# Altium PCB 127PM FROM SCRATCH.PcbDoc
Units mil, origin at the board's own origin, x right, y up, seen from the top; angles counter-clockwise.
Board outline 2460 x 1595 mil, 2 copper layers (Top Layer, Bottom Layer); 5 components, 10 nets, 38 pads, 4 vias.
Unrouted connection lines stored in the file: 3.
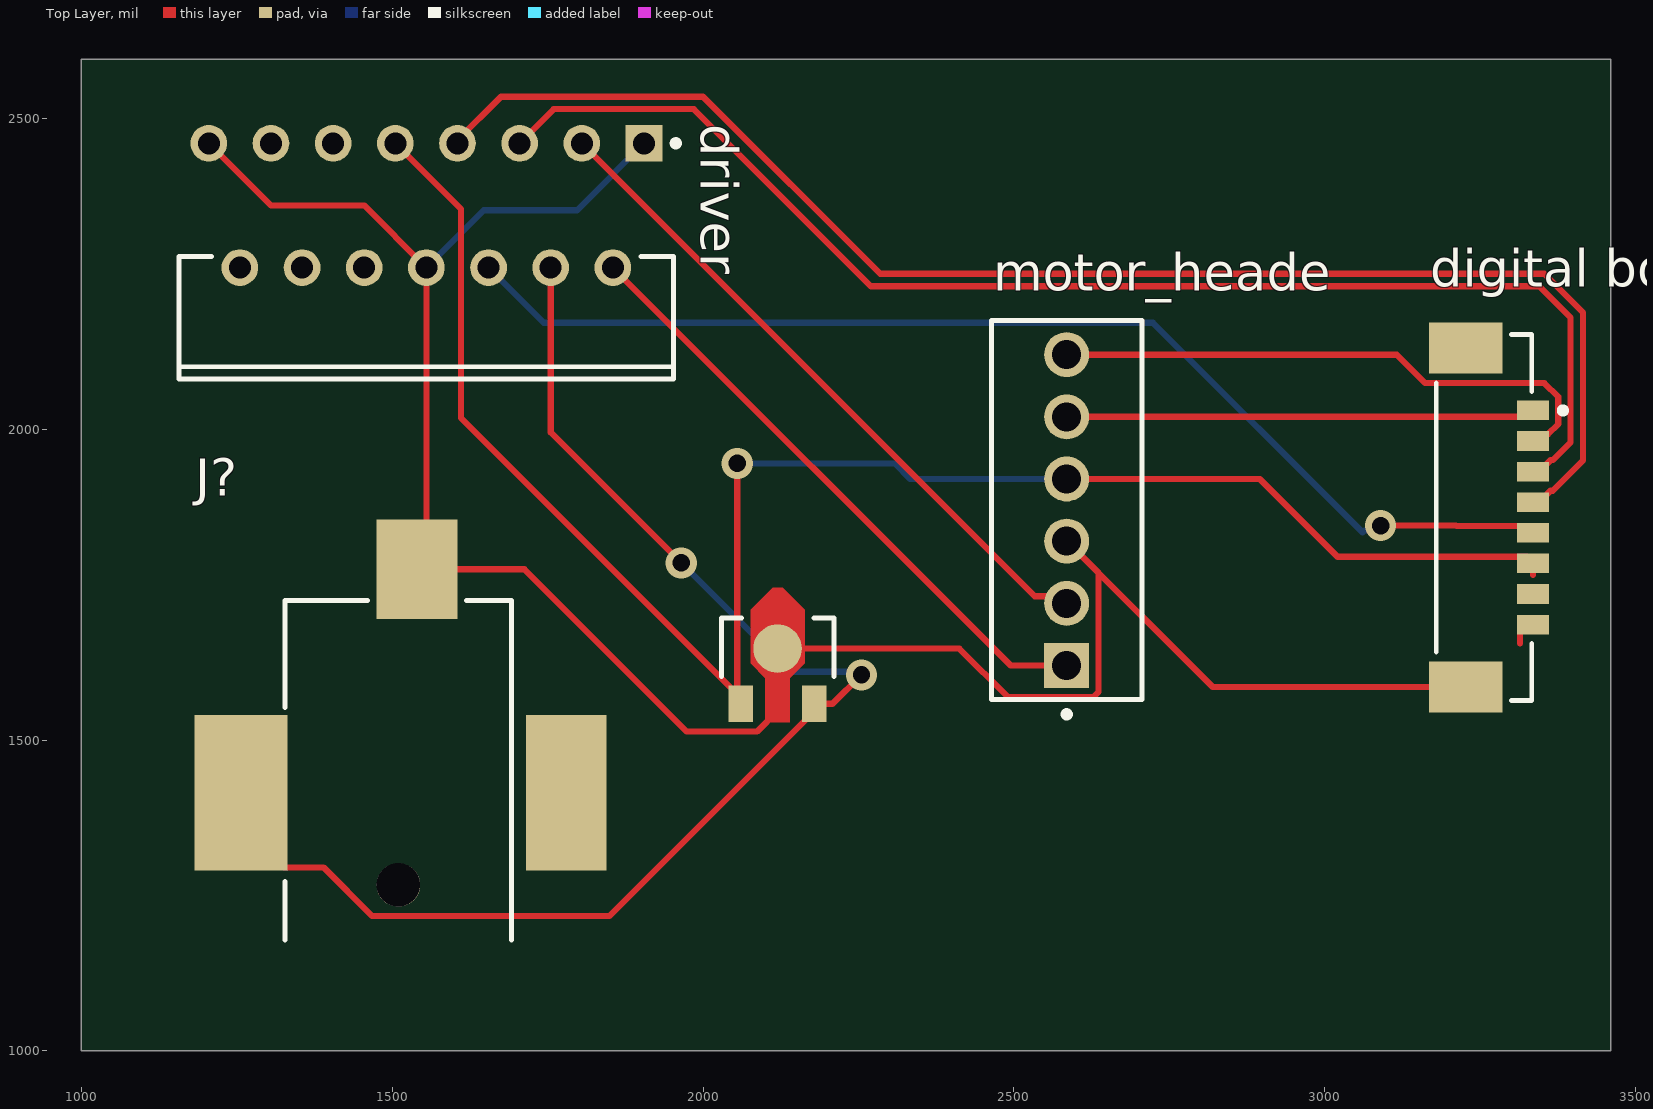
[diagram p0: Top Layer view]
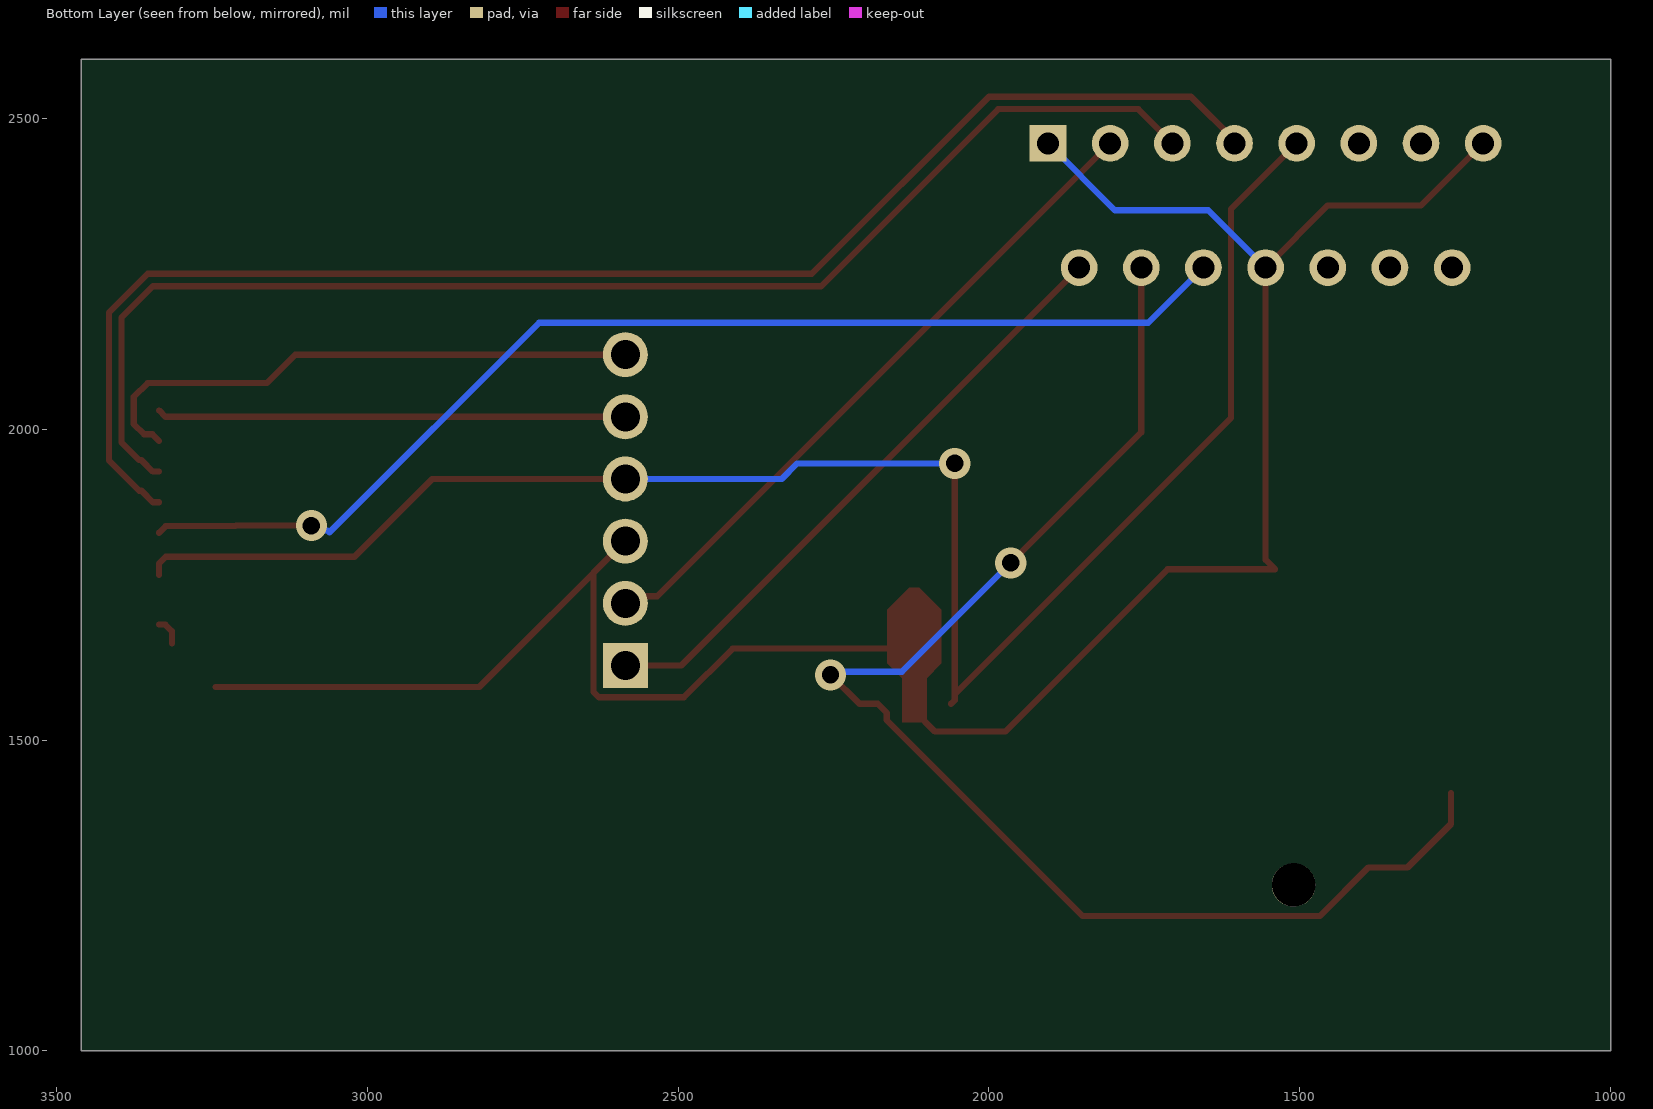
[diagram p1: Bottom Layer view, seen from below]
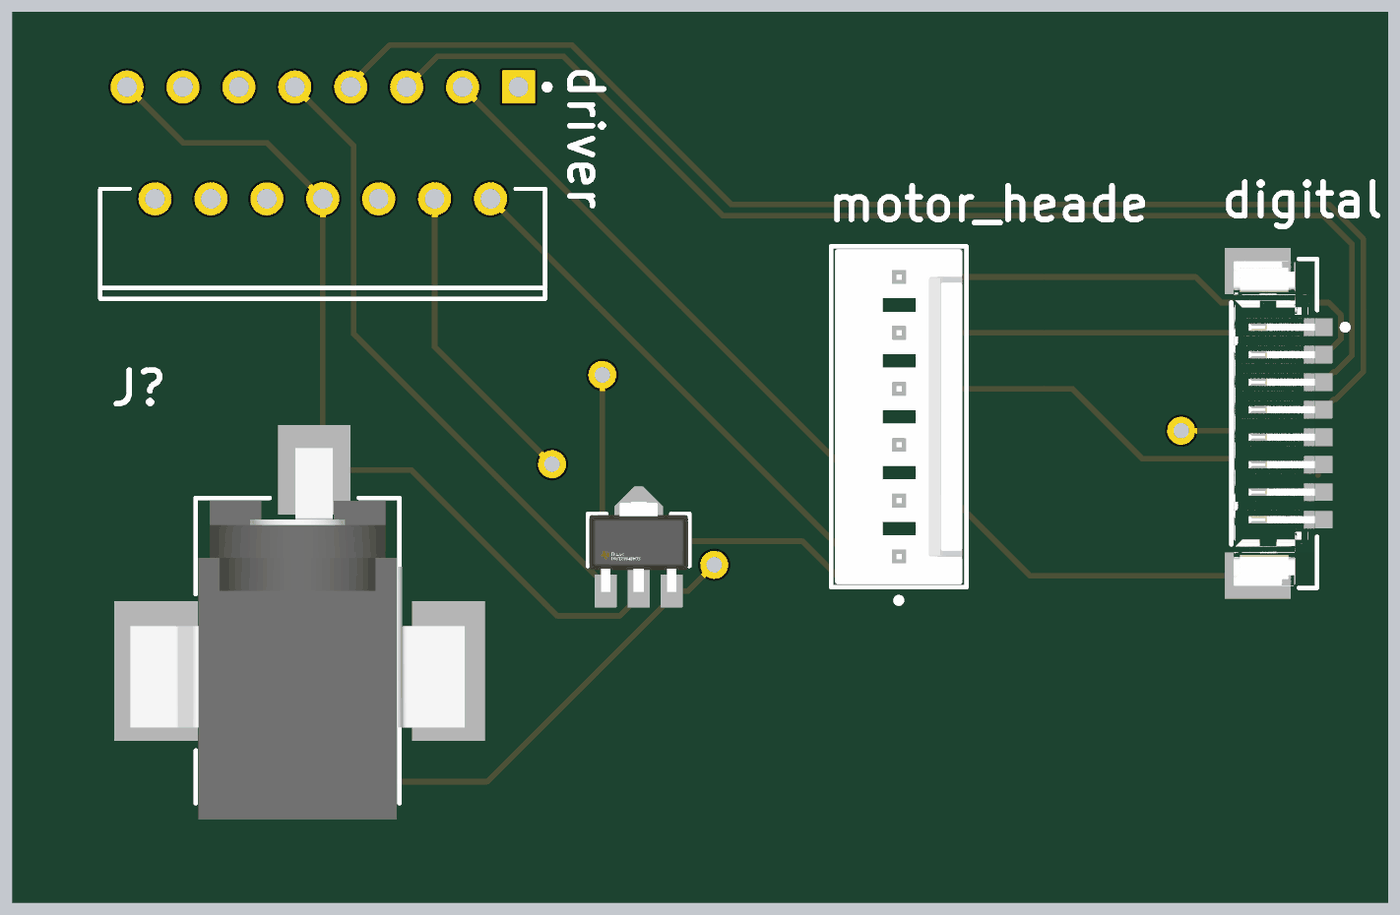
[diagram p2: 3D render of the assembled board from above, using the file's embedded part models]

## Layer stack, top to bottom
Top Solder: solder mask 0.4, Solder Resist, Dk 3.5
Top Layer: signal copper 1.4
Dielectric 1: dielectric 12.6, FR-4, Dk 4.8
Bottom Layer: signal copper 1.4
Bottom Solder: solder mask 0.4, Solder Resist, Dk 3.5

## Board outline
1000,1000 3460,1000 3460,2595 1000,2595

## Design rules (kind name [scope] priority, off if disabled: settings)
Clearance [All] p1: gap=10 ignorepadtopadclearanceinfootprint=FALSE except(0: Arc-Hole Track-Hole SMDPad-Hole THPad-Hole Via-Hole Fill-Hole Poly-Hole Region-Hole Text-Hole)
PolygonConnect [All] p1: connectstyle=Relief reliefconductorwidth=10 reliefentries=4 polygonreliefangle="90 Angle" airgapwidth=10
RoutingVias [All] p1: holewidth=28 width=50 viastyle="Through Hole" minholewidth=28 minwidth=50 maxholewidth=28 maxwidth=50
SolderMaskExpansion [All] p1: expansion=4 istentingtop=FALSE
Width [All] p1: maxlimit=10 minlimit=10 preferedwidth=10
30 further rules are at their usual default settings.

## Components (designator, comment, footprint, x,y, rotation, side; value= is the part's Value field where it differs from the comment)
"digital board I/O header" "53398-0871" FP-53398-0871-MFG 3256.26,1858.03 r90 top
driver "L298N" STM-FM-15 1555,2360 r270 top
J? "RASM722PTR13X" FP-RASM722PTR13X-MFG 1509.92,1434.29 r0 top
motor_heade "22-27-2061" FP-22-27-2061-MFG 2585,1870 r90 top
? "UA78L05CPK" FP-PK0003A-MFG 2120,1645 r0 top

## Footprints (in the part's own frame and the unit in brackets; to place one, negate y for a bottom-side part, rotate by r counter-clockwise, add the part's x,y. Pads: shape width x height; smd on the part's side, far side on the other; paste and mask are expansions set on the pad)
FP-22-27-2061-MFG [mm]
  rect 1.84x1.84 hole 1.19 paste-1000 mask+0: 1(-6.35,0)
  round 1.84 hole 1.19 paste-1000 mask+0: 2(-3.81,0) 3(-1.27,0) 4(1.27,0) 5(3.81,0) 6(6.35,0)
  silkscreen extent -8.47,-3.08 7.75,3.08, body extent -7.85,-3.18 7.85,3.17, height 0.25
FP-53398-0871-MFG [mm]
  rect 0.8x1.3 smd paste+0 mask+0: 1(4.375,-2) 2(3.125,-2) 3(1.875,-2) 4(0.625,-2) 5(-0.625,-2) 6(-1.875,-2) 7(-3.125,-2) 8(-4.375,-2)
  rect 2.1x3 smd paste+0 mask+0: 9(-6.925,0.75) 10(6.925,0.75)
  silkscreen extent -7.47,-3.35 7.47,1.95, body extent -8.08,-2.75 8.08,2.35, height 0.25
FP-PK0003A-MFG [mm]
  rect 1x1.5 smd paste+0 mask+0: 1(-1.5,-2.203) 3(1.5,-2.203)
  round 1.98 smd paste+0 mask+0: 2(0,0.058)
  Top Layer region: 0,-2.953 -0.5,-2.953 -0.5,-1.152 -1.1,-0.553 -1.1,1.647 -0.2,2.548 0.2,2.548 1.1,1.647 1.1,-0.553 0.5,-1.152 0.5,-2.953
  silkscreen extent -2.3,-1.08 2.3,1.3, body extent -2.55,-3.05 2.55,2.65, height 0.25
FP-RASM722PTR13X-MFG [mm]
  rect 3.3x4.06 smd paste+0 mask+0: 1(0.76,8.65)
  rect 3.81x6.35 smd paste+0 mask+0: 2(-6.43,-0.49)
  rect 3.3x6.35 smd paste+0 mask+0: 3(6.86,-0.49)
  round 1.78 hole 1.78 unplated paste-1000 mask+0: ""(0,-4.25)
  silkscreen extent -4.63,-6.5 4.63,7.38, body extent -8.43,-7.48 8.61,10.78, height 0.25
STM-FM-15 [mm] "FM, 15-Leads, Body 20.2x5mm, Pitch 1.27mm"
  rect 1.5x1.5 hole 0.9: 1(-2.54,8.89)
  round 1.5 hole 0.9: 2(2.54,7.62) 3(-2.54,6.35) 4(2.54,5.08) 5(-2.54,3.81) 6(2.54,2.54) 7(-2.54,1.27) 8(2.54,0) 9(-2.54,-1.27) 10(2.54,-2.54) 11(-2.54,-3.81) 12(2.54,-5.08) 13(-2.54,-6.35) 14(2.54,-7.62) 15(-2.54,-8.89)
  silkscreen extent -2.66,-10.1 7.09,10.32, body extent -2.8,-10.1 7.09,10.1, height 21

## Part data
"digital board I/O header": library part CMP-04776-000009-1, "CONN HEADER SMD 8POS 1.25MM", Ambient Temperature Range High=+105°C, Ambient Temperature Range Low=-40°C, Current Rating=1A, Manufacturer=Molex, Package=0, Temperature="-40°C to +105°C", Voltage Rating=125V, Automotive=No, Category=Conn, ComponentLink2Description=Datasheet, ComponentLink2URL=https://www.molex.com/pdm_docs/ps/PS-51021-024-001.pdf, Conn Gender=Male, Conn Orientation=Vertical, Contact Material=Tin,Nickel, Device Class L1=Connectors, Device Class L2="Headers and Wire Housings", Device Class L3=unset, Digikey Description="CONN HEADER SMD 8POS 1.25MM", Footprint Url=https://www.molex.com/pdm_docs/sd/533980871_sd.pdf, Height=4.9mm, Lead Free=Yes, Manufacturer Part Number=53398-0871, Mouser Description="Headers & Wire Housings VERTICAL HDR SMT 8P", Number Of Contacts=8, Number Of Rows=1, Octopart=https://octopart.com/53398-0871-molex-655298, Pitch=1.25mm, RoHS=TRUE, Standoff Height=0.05mm, Temperature Range High=+105°C, Temperature Range Low=-40°C
driver: library part CMP-2000-06526-1, "Dual Full-Bridge Driver, 4.8 to 46 V, -40 to 150 degC, 15-Pin FM (MW 15L), RoHS, Tube", Driver Case Style=Multiwatt, Manufacturer=STMicroelectronics, Operating Temperature Max=130°C, Operating Temperature Min=-25°C, Output Current=2A, Output Voltage=46V, Package Description="15-Pin Flange Mount, Body 5 x 19.6 mm, Pitch 1.27 mm", Package Reference=FM-15, PartNumber=L298, Supply Voltage Max=7V, Supply Voltage Min=4.5V, Automotive Qualification Standard=-, Datasheet URL=https://datasheet.ciiva.com/15109/getdatasheetpartid-50682-15109332.pdf, Datasheet Version=01/2000, Manufacturer URL=http://www.st.com/, Motor Type=FullBridge, Mounting Technology=ThroughHole, MSL=-, No. of Outputs=4Outputs, No. of Pins=15Pins, Packaging=Each, Product Range=-, SVHC=NoSVHC(17-Dec-2015)
J?: library part CMP-47995-000002-1, "CONN PWR JACK 2.1X5.5MM SOLDER", Case/Package=SMD/SMT, Color=Black, Current Rating=5A, Package Quantity=120, Connector Type=Jack, Contact Material="Copper Alloy", Contact Plating=Tin, Gender=Male, Housing Color=Black, Housing Material=Thermoplastic, Mount="Surface Mount", Shielding=Unshielded, Termination=Solder
motor_heade: library part CMP-04776-000309-1, "CONN HEADER VERT 6POS 2.54MM", Color=Natural, Contact Resistance=10mR, Current Rating=4A, Flammability Rating="UL94 V-0", Housing Color=White, Max Operating Temperature=75°C, Max Voltage Rating (AC)=250V, Min Operating Temperature=0°C, Package Quantity=10000, Connector Type="Male Pin", Contact Material=Brass, Contact Mating Length=0.295inch, Contact Plating=Tin, Contact Type="Male Pin", Depth=5.8mm, Fastening Type=Friction, Gender=Male, Hole Diameter=1.02mm, Housing Material=Nylon, Lead Pitch=2.54mm, Length=15.24mm, Material=Nylon, Max Current Rating=4A, Mount="Through Hole", Number Of Contacts=6, Number of Positions=6, Number Of Rows=1, Orientation=Straight, Packaging=Bulk, Pitch=2.54mm, Radiation Hardening=No, REACH SVHC="No SVHC", Series=KK, Termination=Solder, Voltage Rating=250V, Voltage Rating (AC)=250V, Working Voltage=250V
?: library part CMP-2000-07341-2, "IC REG LINEAR 5V 100MA SOT89-3", Dropout Voltage=1.7V, Manufacturer="Texas Instruments", Max Junction Temp=+125°C, Max Supply Voltage=20V, Min Supply Voltage=7V, Nominal Supply Current=3.8mA, Output Current=100mA, Output Voltage=5V, Package=PK0003A, Temperature="0°C to +125°C", Temperature Range Low=0°C, Accuracy Percentage=3.75%, Automotive=No, Category=IC, ComponentLink2Description=Datasheet, ComponentLink2URL=https://www.ti.com/lit/ds/symlink/ua78l.pdf, Device Class L1="Integrated Circuits (ICs)", Device Class L2="Power Management ICs", Device Class L3="Voltage Regulators - Linear", Digikey Description="IC REG LINEAR 5V 100MA SOT89-3", Height=1.6mm, Lead Free=Yes, Manufacturer Part Number=UA78L05CPK, Mouser Description="100-mA, 30-V VIN, Positive-Voltage Linear Regulators 3-SOT-89 0 to 125", Number Of Outputs=1, Octopart=https://octopart.com/ua78l05cpk-texas+instruments-525289, Output Type=Fixed, RoHS=TRUE, Temperature Range High=+125°C

## Via types
v1: diameter 50, hole 28, Top Layer to Bottom Layer, 4 vias

## Nets (pads, with @x,y where several pads share a name; then routed paths per layer and width w, separated by ;. In a path a pad name is that pad's centre, name@x,y a point inside that pad or via, vN(x,y) a via of type N, cw(c..) or ccw(c..) an arc to the next point about the centre after c; other vN are vias at no path point)
Net_1: "digital board I/O header.6" ?.1 driver.9 motor_heade.4 | length 2868
  Top Layer w10: driver.9 1610.47,2354.53 1610.47,2018.6 ?.1@2055,1574.07 ; v1(2055,1945) ?.1@2055,1574.07 ; ?.1 2055,1564.23 ?.1@2055,1574.07 ; motor_heade.4 2895.63,1920 3020.67,1794.96 3324.25,1794.96 3335,1784.21 3335,1765.75
  Bottom Layer w10: v1(2055,1945) 2308.29,1945 2333.29,1920 motor_heade.4
Net_2: "digital board I/O header.7" "digital board I/O header.8" "digital board I/O header.9" "digital board I/O header.10" ?.2 driver.1 driver.8 driver.15 J?.1 motor_heade.3 | length 3684.6
  Top Layer w10: driver.15 1305,2360 1455,2360 driver.8 1555,1790 J?.1 1712.78,1774.84 1973.86,1513.76 2086.84,1513.76 2120,1546.92 2120,1555 ; ?.2 2412.27,1647.27 2490.76,1568.78 2627.43,1568.78 2636.22,1577.57 2636.22,1768.78 motor_heade.3 2819.61,1585.39 3226.73,1585.39 3244.45,1585.39 ; 3314.41,1655.35 3314.41,1675.04 3325.16,1685.79 3335,1685.79
  Bottom Layer w10: driver.8 1647.43,2352.43 1797.43,2352.43 driver.1
Net_3: ?.3 driver.4 J?.2 | length 2203.5
  Top Layer w10: J?.2 1256.77,1365 1326.77,1295 1389.67,1295 1467.75,1216.93 1849.07,1216.93 2164.37,1532.23 2164.37,1543.6 ?.3 2208.29,1558.29 v1(2255,1605) ; driver.4 1755,1995 v1(1965,1785)
  Bottom Layer w10: v1(1965,1785) 2140,1610 2250,1610 v1(2255,1605)
"Netdigital board I/O header_1": "digital board I/O header.1" motor_heade.5 | length 754.3
  Top Layer w10: motor_heade.5 3324.72,2020 3335,2030.28
"Netdigital board I/O header_2": "digital board I/O header.2" motor_heade.6 | length 914.5
  Top Layer w10: motor_heade.6 3115.79,2120 3161.46,2074.33 3353.5,2074.33 3375.59,2052.24 3375.59,2008.31 3359.09,1991.81 3345.75,1991.81 3335,1981.06
"Netdigital board I/O header_3": "digital board I/O header.3" driver.5 | length 2132.8
  Top Layer w10: driver.5 1760,2515 1985,2515 2270,2230 3345,2230 3395.59,2179.41 3395.59,1979.1 3366.8,1950.31 3363.31,1950.31 3344.84,1931.85 3335,1931.85
"Netdigital board I/O header_4": "digital board I/O header.4" driver.7 | length 2334.7
  Top Layer w10: driver.7 1605,2465 1675,2535 2000,2535 2285,2250 3353.28,2250 3415.59,2187.69 3415.59,1949.89 3366.8,1901.1 3363.31,1901.1 3344.84,1882.64 3335,1882.64
"Netdigital board I/O header_5": "digital board I/O header.5" driver.6 | length 1865.7
  Top Layer w10: v1(3090,1845) 3211.03,1845 3211.86,1844.17 3324.25,1844.17 3335,1833.43
  Bottom Layer w10: driver.6 1743.78,2171.22 2723.78,2171.22 3060.86,1834.14 3064.06,1837.35 3082.35,1837.35 v1(3090,1845)
Netdriver_2: driver.2 motor_heade.1 | length 995.1
  Top Layer w10: driver.2 2495,1620 motor_heade.1
Netdriver_3: driver.3 motor_heade.2 | length 1086.5
  Top Layer w10: driver.3 2533.78,1731.22 2573.78,1731.22 motor_heade.2
pads on no net: driver.10 driver.11 driver.12 driver.13 driver.14 J?. J?.3